# Altium PCB ADC_Klipper_Board.PcbDoc (part 1 of 2)
Units mm, origin at the board's own origin, x right, y up, seen from the top; angles counter-clockwise.
Board outline 69 x 45 mm, 4 copper layers (F.Cu, In1.Cu, In2.Cu, B.Cu); 84 components, 97 nets, 307 pads, 172 vias.
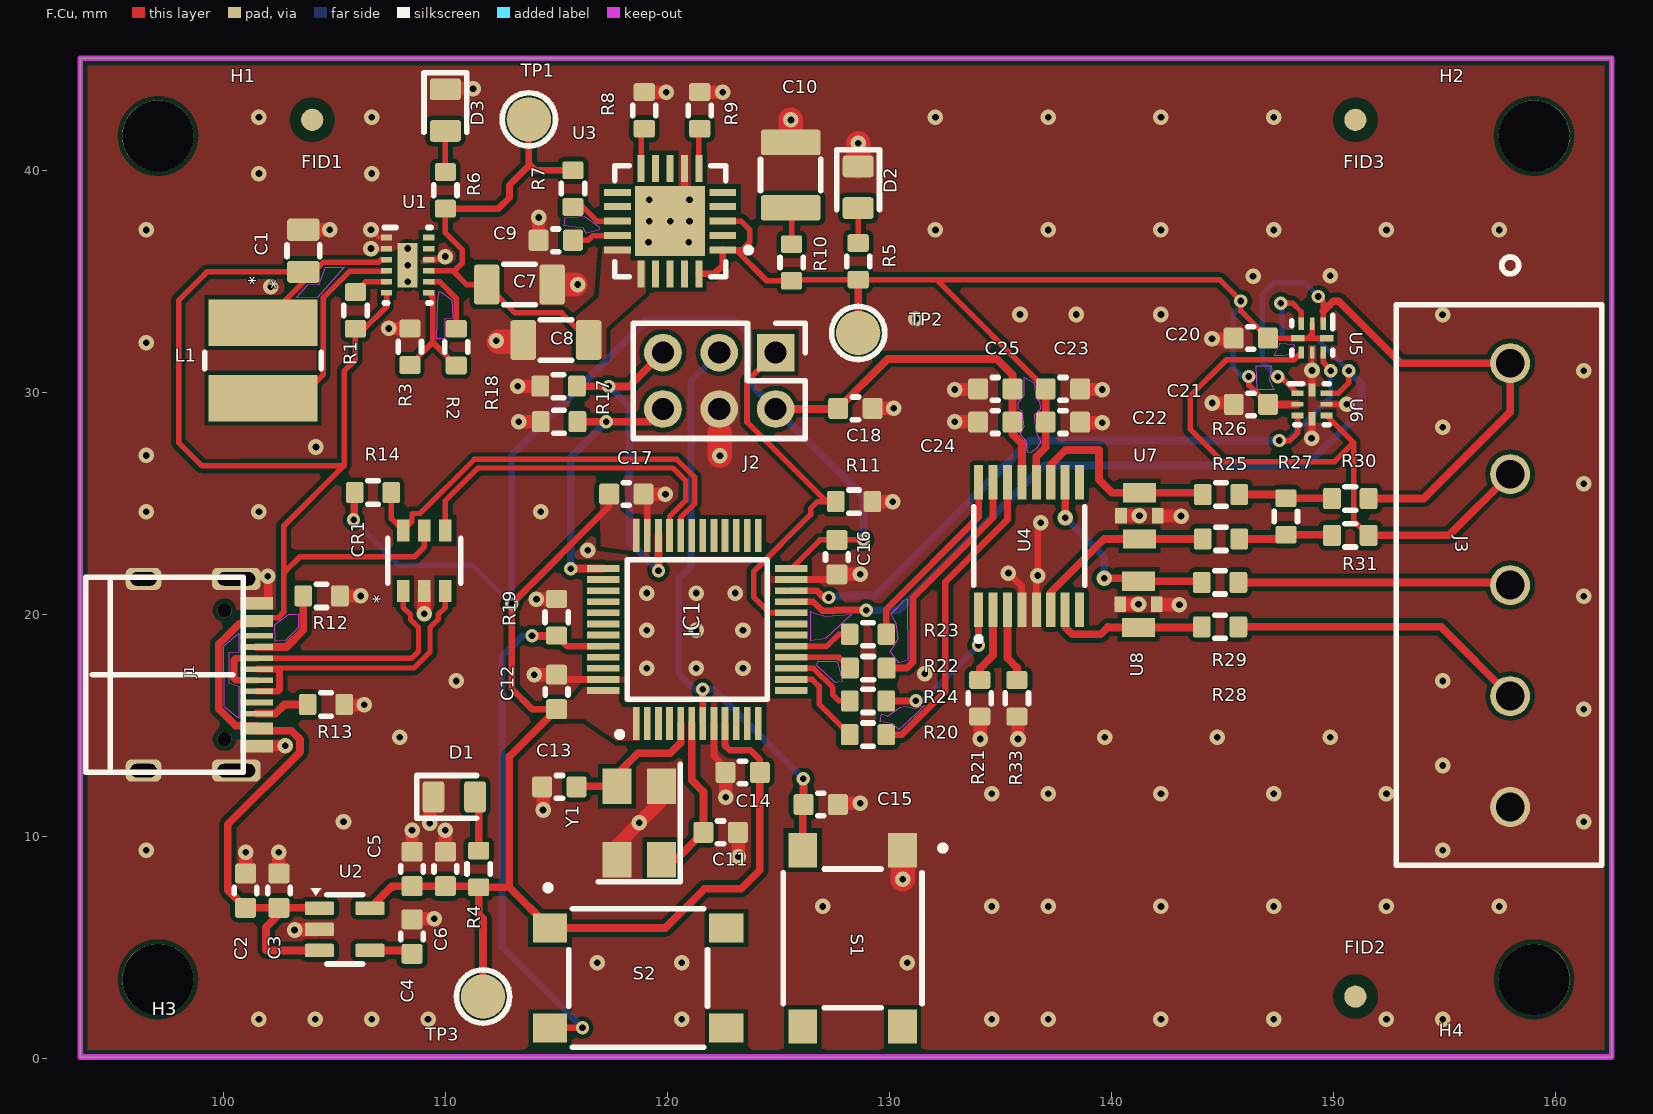
[diagram p0: F.Cu view]
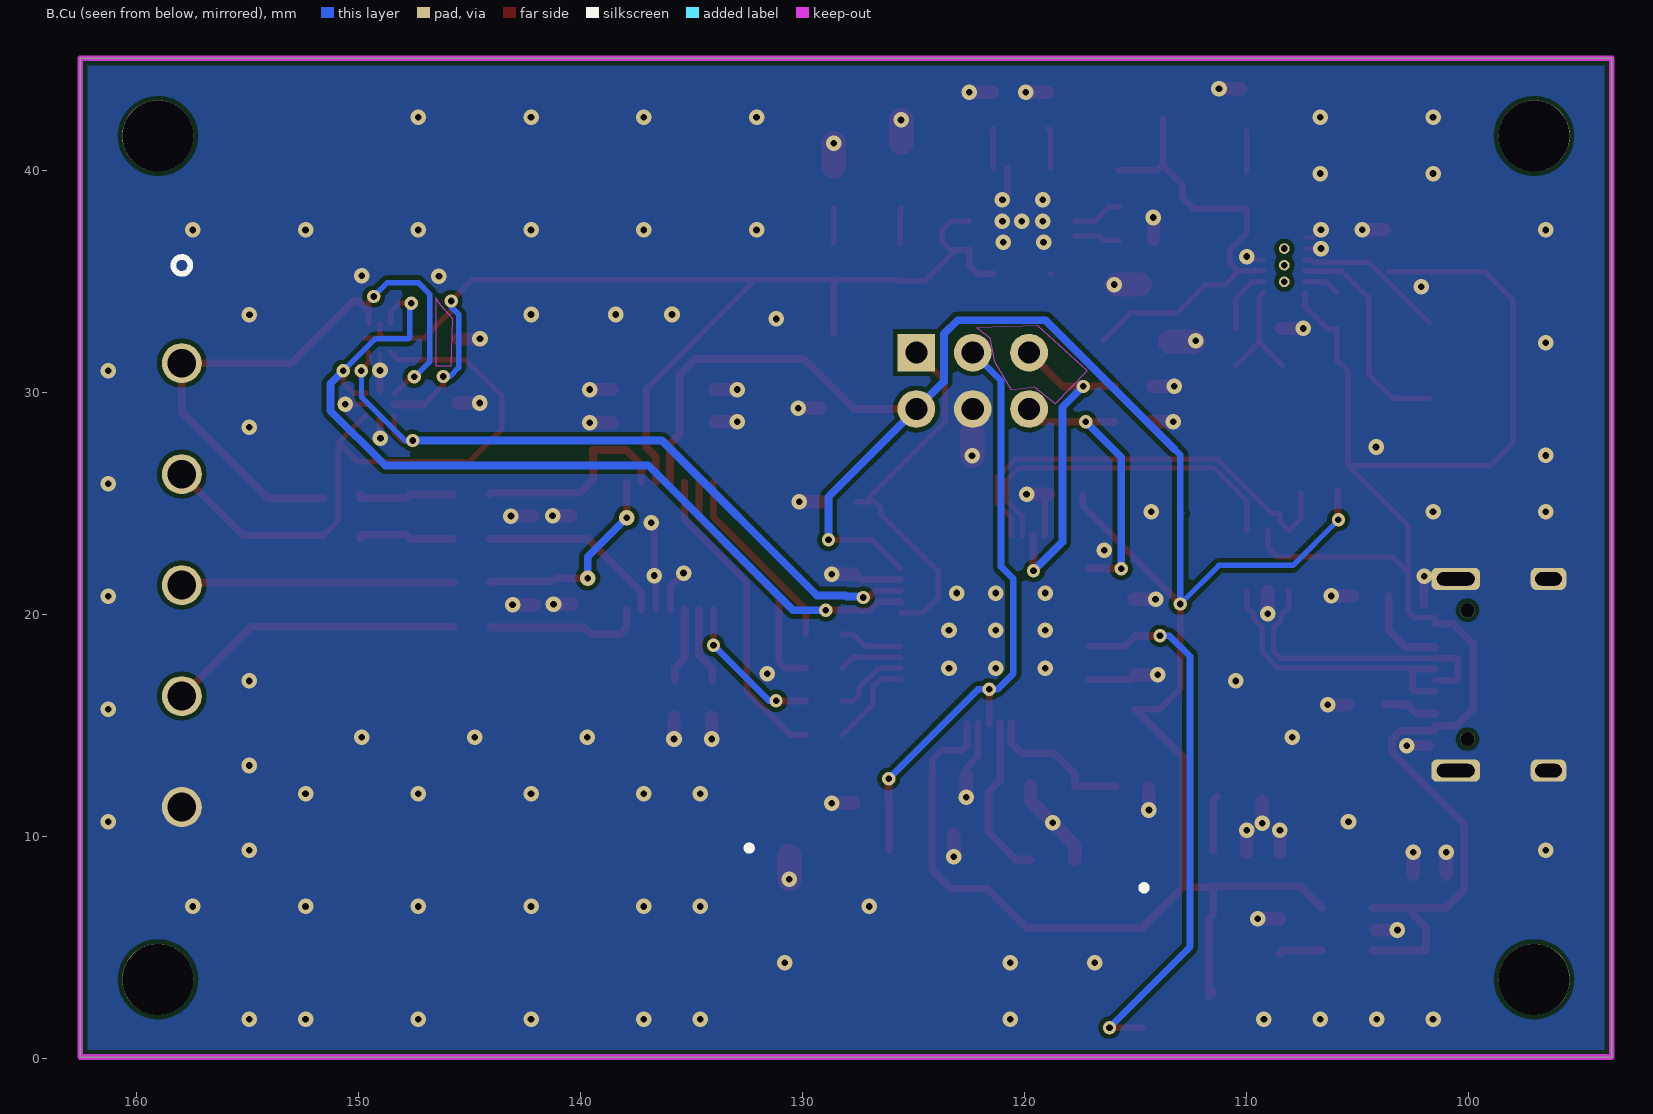
[diagram p1: B.Cu view, seen from below]
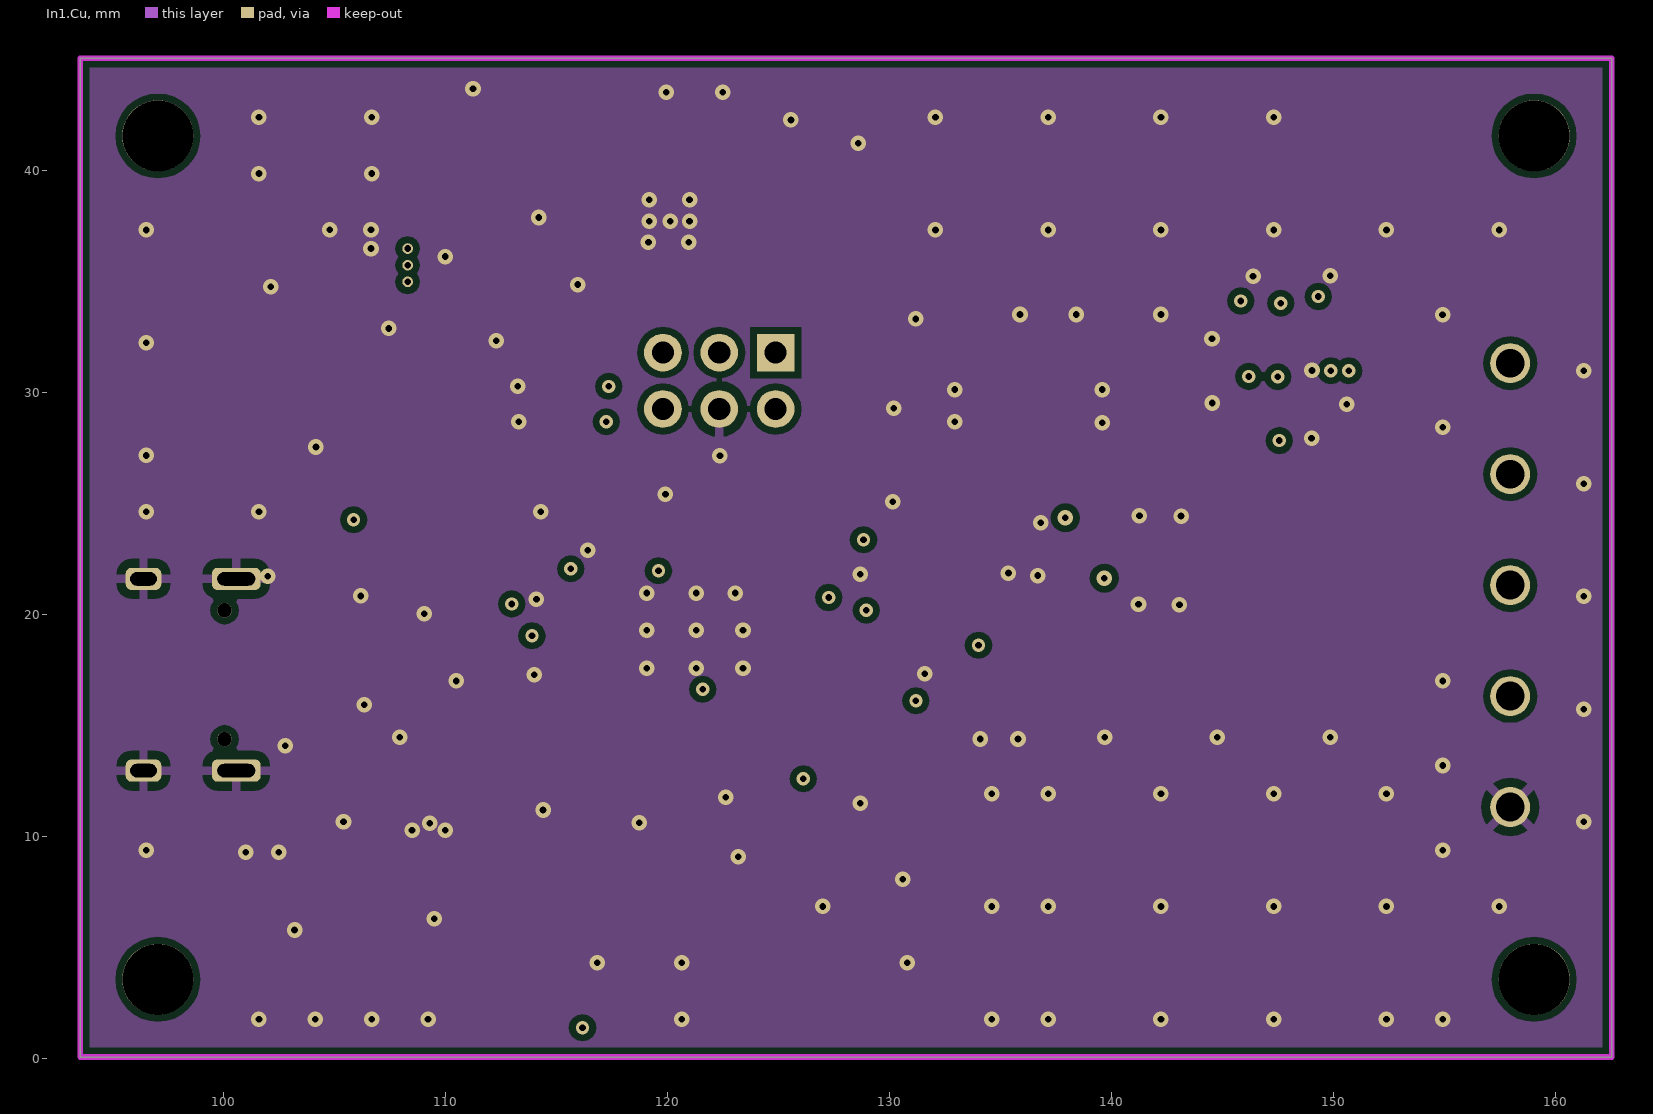
[diagram p2: In1.Cu]
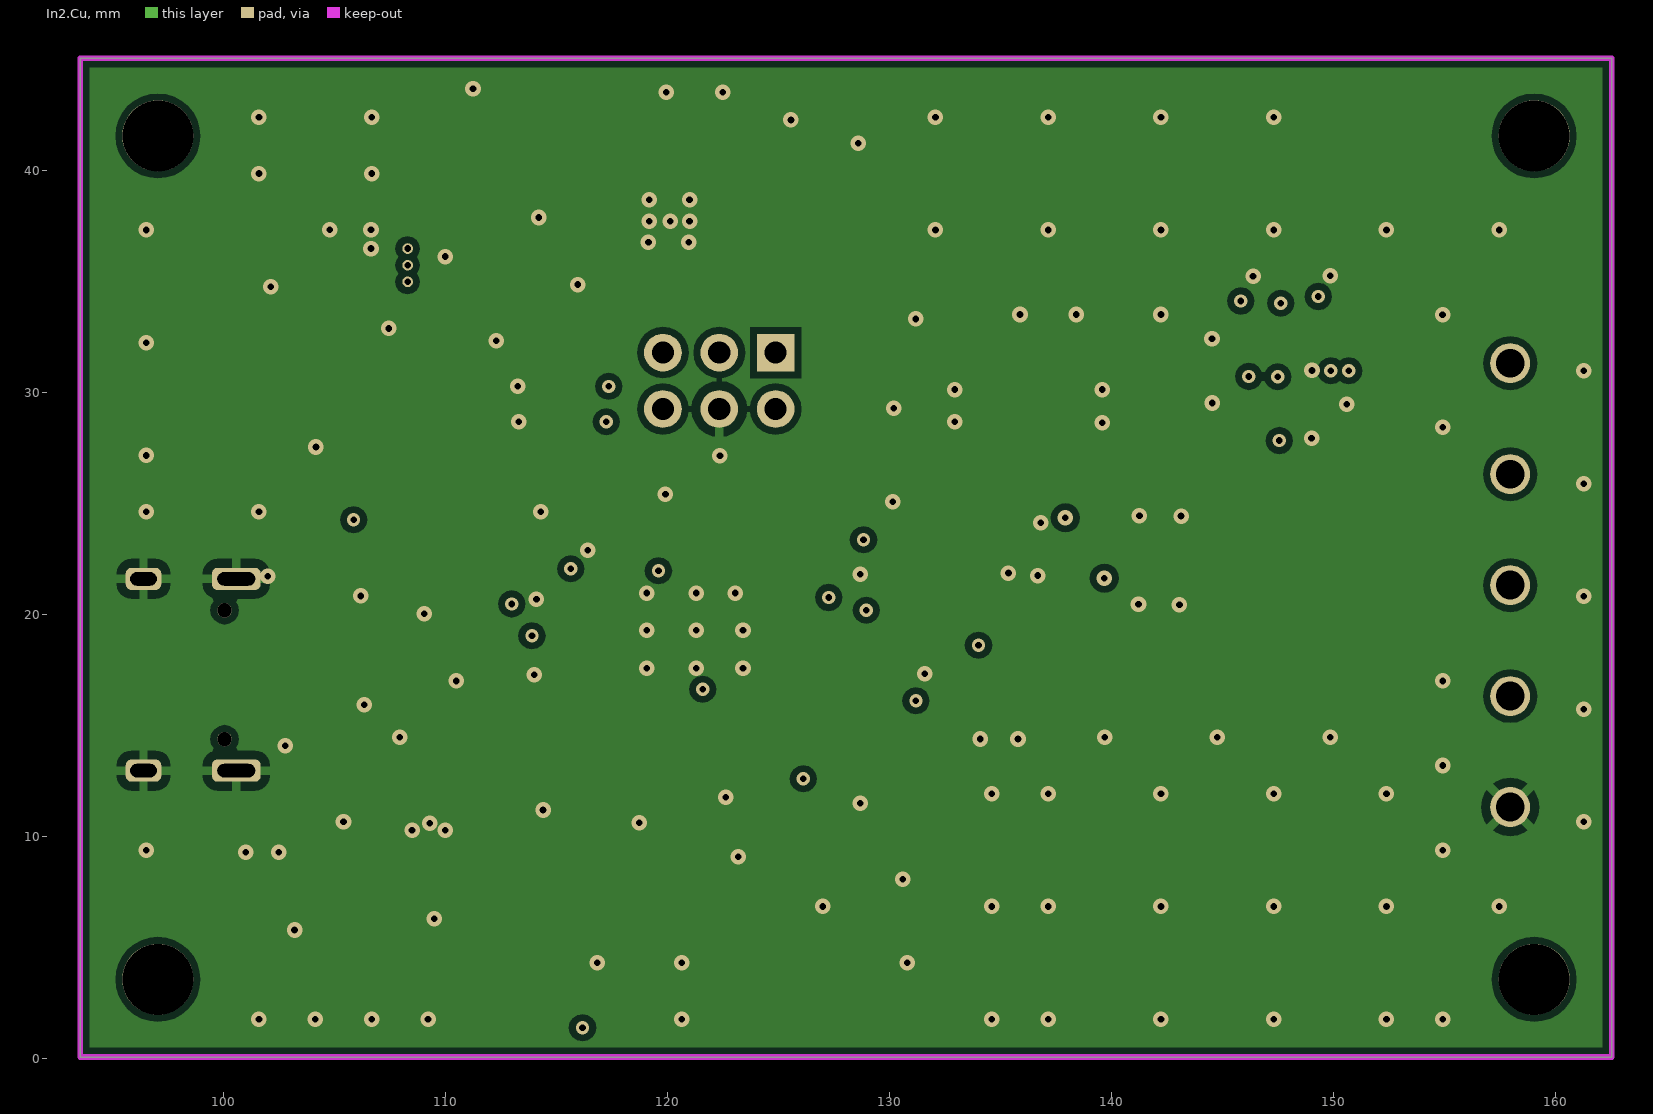
[diagram p3: In2.Cu]

## Layer stack, top to bottom
F.Mask: solder mask 0.0102, Solder Resist, Dk 3.5
F.Cu: signal copper 0.0356
Dielectric 1: dielectric 0.32, FR-4, Dk 4.8
In1.Cu: signal copper 0.0356
Dielectric2: dielectric 0.32, FR-4, Dk 4.8
In2.Cu: signal copper 0.0356
Dielectric3: dielectric 0.32, FR-4, Dk 4.8
B.Cu: signal copper 0.0356
B.Mask: solder mask 0.0102, Solder Resist, Dk 3.5

## Board outline
93.55,45.075 93.55,0.075 162.55,0.075 162.55,45.075 93.55,45.075

## Design rules (kind name [scope] priority, off if disabled: settings)
Clearance "Clearence 0,5_PadClass" [InPadClass('Pad Class Clearance 0,5')] p1: gap=0.5 ignorepadtopadclearanceinfootprint=FALSE
Clearance "Clearence 0,3_Polygon" [InNamedPolygon('In1.Cu-GND') OR InNamedPolygon('In2.Cu-GND')] p2: gap=0.3 ignorepadtopadclearanceinfootprint=FALSE
Clearance "Clearence 0,2_Polygon" [InNamedPolygon('F.Cu-+3V3') OR InNamedPolygon('F.Cu-GND-6') OR InNamedPolygon('F.Cu-+5V5') OR InNamedPolygon('F.Cu-+3V3-1') OR InNamedPolygon('F.Cu-GND-9') OR InNamedPolygon('B.Cu-GND')] p3: gap=0.2 ignorepadtopadclearanceinfootprint=FALSE
Clearance "Clearence 0,01_PadClass" [InPadClass('Pad Class Clearance 0,01')] p4: gap=0.01 ignorepadtopadclearanceinfootprint=FALSE
MinimumSolderMaskSliver [All] p1: minsoldermaskwidth=0
PolygonConnect Polygon_B.Cu-+3V3_ConnectDirect [IsNamedPolygon('B.Cu-+3V3')] p1: connectstyle=Direct reliefconductorwidth=0.254 reliefentries=4 polygonreliefangle="90 Angle" airgapwidth=0.254
PolygonConnect Polygon_In2.Cu-GND_ConnectDirect [IsNamedPolygon('In2.Cu-GND') vs IsVia] p2: connectstyle=Direct reliefconductorwidth=0.254 reliefentries=4 polygonreliefangle="90 Angle" airgapwidth=0.254
PolygonConnect Polygon_In2.Cu-GND_ConnectRelief45 [IsNamedPolygon('In2.Cu-GND') vs (IsThruPin or IsSMTPin) and (PadShape_AllLayers = 'Round')] p3: connectstyle=Relief reliefconductorwidth=0.4 reliefentries=4 polygonreliefangle="45 Angle" airgapwidth=0.4
PolygonConnect Polygon_In2.Cu-GND_ConnectRelief90 [IsNamedPolygon('In2.Cu-GND') vs (IsThruPin or IsSMTPin) and (PadShape_AllLayers <> 'Round')] p4: connectstyle=Relief reliefconductorwidth=0.4 reliefentries=4 polygonreliefangle="90 Angle" airgapwidth=0.4
PolygonConnect Polygon_In1.Cu-GND_ConnectDirect [IsNamedPolygon('In1.Cu-GND') vs IsVia] p5: connectstyle=Direct reliefconductorwidth=0.254 reliefentries=4 polygonreliefangle="90 Angle" airgapwidth=0.254
PolygonConnect Polygon_In1.Cu-GND_ConnectRelief45 [IsNamedPolygon('In1.Cu-GND') vs (IsThruPin or IsSMTPin) and (PadShape_AllLayers = 'Round')] p6: connectstyle=Relief reliefconductorwidth=0.4 reliefentries=4 polygonreliefangle="45 Angle" airgapwidth=0.4
PolygonConnect Polygon_In1.Cu-GND_ConnectRelief90 [IsNamedPolygon('In1.Cu-GND') vs (IsThruPin or IsSMTPin) and (PadShape_AllLayers <> 'Round')] p7: connectstyle=Relief reliefconductorwidth=0.4 reliefentries=4 polygonreliefangle="90 Angle" airgapwidth=0.4
PolygonConnect Polygon_B.Cu-GND_ConnectDirect [IsNamedPolygon('B.Cu-GND')] p8: connectstyle=Direct reliefconductorwidth=0.254 reliefentries=4 polygonreliefangle="90 Angle" airgapwidth=0.254
PolygonConnect Polygon_F.Cu-GND-9_ConnectDirect [IsNamedPolygon('F.Cu-GND-9')] p9: connectstyle=Direct reliefconductorwidth=0.254 reliefentries=4 polygonreliefangle="90 Angle" airgapwidth=0.254
PolygonConnect Polygon_F.Cu-GND-8_ConnectDirect [IsNamedPolygon('F.Cu-GND-8')] p10: connectstyle=Direct reliefconductorwidth=0.254 reliefentries=4 polygonreliefangle="90 Angle" airgapwidth=0.254
PolygonConnect Polygon_F.Cu-+3V3-1_ConnectDirect [IsNamedPolygon('F.Cu-+3V3-1')] p11: connectstyle=Direct reliefconductorwidth=0.254 reliefentries=4 polygonreliefangle="90 Angle" airgapwidth=0.254
PolygonConnect Polygon_F.Cu-GND-7_ConnectDirect [IsNamedPolygon('F.Cu-GND-7')] p12: connectstyle=Direct reliefconductorwidth=0.254 reliefentries=4 polygonreliefangle="90 Angle" airgapwidth=0.254
PolygonConnect Polygon_F.Cu-+5V5_ConnectDirect [IsNamedPolygon('F.Cu-+5V5')] p13: connectstyle=Direct reliefconductorwidth=0.254 reliefentries=4 polygonreliefangle="90 Angle" airgapwidth=0.254
PolygonConnect Polygon_F.Cu-GND-6_ConnectDirect [IsNamedPolygon('F.Cu-GND-6')] p14: connectstyle=Direct reliefconductorwidth=0.254 reliefentries=4 polygonreliefangle="90 Angle" airgapwidth=0.254
PolygonConnect Polygon_F.Cu-GND-5_ConnectDirect [IsNamedPolygon('F.Cu-GND-5')] p15: connectstyle=Direct reliefconductorwidth=0.254 reliefentries=4 polygonreliefangle="90 Angle" airgapwidth=0.254
PolygonConnect Polygon_F.Cu-GND-4_ConnectDirect [IsNamedPolygon('F.Cu-GND-4')] p16: connectstyle=Direct reliefconductorwidth=0.254 reliefentries=4 polygonreliefangle="90 Angle" airgapwidth=0.254
PolygonConnect Polygon_F.Cu-GND-3_ConnectDirect [IsNamedPolygon('F.Cu-GND-3')] p17: connectstyle=Direct reliefconductorwidth=0.254 reliefentries=4 polygonreliefangle="90 Angle" airgapwidth=0.254
PolygonConnect Polygon_F.Cu-GND-2_ConnectDirect [IsNamedPolygon('F.Cu-GND-2')] p18: connectstyle=Direct reliefconductorwidth=0.254 reliefentries=4 polygonreliefangle="90 Angle" airgapwidth=0.254
PolygonConnect Polygon_F.Cu-GND-1_ConnectDirect [IsNamedPolygon('F.Cu-GND-1')] p19: connectstyle=Direct reliefconductorwidth=0.254 reliefentries=4 polygonreliefangle="90 Angle" airgapwidth=0.254
PolygonConnect Polygon_F.Cu-+3V3_ConnectDirect [IsNamedPolygon('F.Cu-+3V3')] p20: connectstyle=Direct reliefconductorwidth=0.254 reliefentries=4 polygonreliefangle="90 Angle" airgapwidth=0.254
PolygonConnect Polygon_F.Cu-GND_ConnectDirect [IsNamedPolygon('F.Cu-GND')] p21: connectstyle=Direct reliefconductorwidth=0.254 reliefentries=4 polygonreliefangle="90 Angle" airgapwidth=0.254
RoutingVias [All] p1: holewidth=0.711 width=1.27 viastyle="Through Hole" minholewidth=0.711 minwidth=1.27 maxholewidth=0.711 maxwidth=1.27
SilkToSilkClearance [All] p1: silktosilkclearance=0
SilkToSolderMaskClearance [IsPad] p1: minsilkscreentomaskgap=0 clearancetoexposedcopper=TRUE
SolderMaskExpansion [All] p1: expansion=0.102 istentingtop=FALSE
Width [All] p1: maxlimit=10 minlimit=0.254 preferedwidth=0.254 midlayer1_maxwidth=0.254 midlayer2_maxwidth=0.254 minimp=50.000000 maximp=50.000000 favimp=50.000000
27 further rules are at their usual default settings.

## Classes and differential pairs
pad class "Pad Class Clearance 0,01": J1-Un1 J1-Un2
pad class "Pad Class Clearance 0,5": FID1-Un1 FID2-Un1 FID3-Un1

## Components (designator, comment, footprint, x,y, rotation, side; value= is the part's Value field where it differs from the comment)
C1 "Comment" C_0805_2012Metric 103.6,36.4 r90 top value=4.7uF
C2 "Comment" C_0603_1608Metric 101,7.575 r90 top value=1uF
C3 "Comment" C_0603_1608Metric 102.5,7.575 r90 top value="100 nF"
C4 "Comment" C_0603_1608Metric 108.5,5.5 r90 top value="10 nF"
C5 "Comment" C_0603_1608Metric 108.5,8.55 r90 top value=1uF
C6 "Comment" C_0603_1608Metric 110,8.55 r90 top value="100 nF"
C7 "Comment" C_1206_3216Metric 113.335,34.88 r0 top value=10uF
C8 "Comment" C_1206_3216Metric 114.98,32.38 r180 top value=10uF
C9 "Comment" C_0603_1608Metric 114.975,36.875 r180 top value=1uF
C10 "Comment" C_1210_3225Metric 125.56,39.81 r90 top value=22uF
C11 "Comment" C_0603_1608Metric 122.4,10.2 r180 top value="30 pF"
C12 "Comment" C_0603_1608Metric 115.013,16.525 r90 top value="100 nF"
C13 "Comment" C_0603_1608Metric 115.138,12.25 r0 top value="30 pF"
C14 "Comment" C_0603_1608Metric 123.39,12.9 r180 top value="100 nF"
C15 "Comment" C_0603_1608Metric 126.912,11.45 r180 top value="100 nF"
C16 "Comment" C_0603_1608Metric 127.638,22.6 r270 top value="100 nF"
C17 "Comment" C_0603_1608Metric 118.15,25.44 r0 top value="100 nF"
C18 "Comment" C_0603_1608Metric 128.475,29.3 r180 top value="100 nF"
C20 "Comment" C_0603_1608Metric 146.285,32.467 r180 top value=1uF
C21 "Comment" C_0603_1608Metric 146.295,29.48 r180 top value=1uF
C22 "Comment" C_0603_1608Metric 137.825,28.68 r0 top value=1uF
C23 "Comment" C_0603_1608Metric 137.825,30.18 r0 top value="100 nF"
C24 "Comment" C_0603_1608Metric 134.775,28.68 r180 top value=1uF
C25 "Comment" C_0603_1608Metric 134.775,30.18 r180 top value="100 nF"
CR1 "Comment" SOT23-6L_STM 109.05,22.435 r90 top value=USBLC6-2SC6
D1 "Comment" LED_0805_2012Metric 110.4,11.8 r0 top value=LED
D2 "Comment" LED_0805_2012Metric 128.6,39.262 r270 top value=LED
D3 "Comment" LED_0805_2012Metric 110,42.737 r270 top value=LED
FID1 "Comment" Fiducial_1mm_Mask2mm 104,42.3 r0 top value=Fiducial
FID2 "Comment" Fiducial_1mm_Mask2mm 151,2.8 r0 top value=Fiducial
FID3 "Comment" Fiducial_1mm_Mask2mm 151,42.3 r0 top value=Fiducial
H1 "Comment" MountingHole_3.2mm_M3_ISO7380 97.05,41.575 r0 top value=MountingHole
H2 "Comment" MountingHole_3.2mm_M3_ISO7380 159.05,41.575 r0 top value=MountingHole
H3 "Comment" MountingHole_3.2mm_M3_ISO7380 97.05,3.575 r0 top value=MountingHole
H4 "Comment" MountingHole_3.2mm_M3_ISO7380 159.05,3.575 r0 top value=MountingHole
IC1 "Comment" QFP50P900X900X160-48N 121.35,19.338 r90 top value=STM32F103C6T7A
J1 "Comment" TYPE-C-31-M-12 96.4,17.3 r270 top value=Connector_USB_C_Receptacle_USB2.0
J2 "Comment" PinHeader_2x03_P2.54mm_Vertical 124.88,31.812 r270 top value=DBG
J3 "Comment" CONN_1935190_PXC 157.975,31.337 r270 top value=1935190
L1 "Comment" IND_5028_TDK 101.78,31.46 r270 top value=2.7uH
R1 "Comment" R_0603_1608Metric 105.95,33.715 r90 top value=2.0k
R2 "Comment" R_0603_1608Metric 110.49,32.06 r270 top value=45.3k
R3 "Comment" R_0603_1608Metric 108.4,32.075 r270 top value=10k
R4 "Comment" R_0603_1608Metric 111.5,8.55 r90 top value=6.65k
R5 "Comment" R_0603_1608Metric 128.6,35.925 r90 top value=6.65k
R6 "Comment" R_0603_1608Metric 110,39.125 r90 top value=10k
R7 "Comment" R_0603_1608Metric 115.75,39.2 r270 top value=100k
R8 "Comment" R_0603_1608Metric 118.96,42.725 r90 top value=0
R9 "Comment" R_0603_1608Metric 121.46,42.725 r90 top value=0
R10 "Comment" R_0603_1608Metric 125.6,35.875 r90 top value=0.1
R11 "Comment" R_0603_1608Metric 128.413,25.1 r0 top value=10k
R12 "Comment" R_0603_1608Metric 104.425,20.85 r180 top value=5k1
R13 "Comment" R_0603_1608Metric 104.62,15.96 r180 top value=5k1
R14 "Comment" R_0603_1608Metric 106.74,25.51 r180 top value=1k5
R17 "Comment" R_0603_1608Metric 115.125,28.7 r0 top value=10k
R18 "Comment" R_0603_1608Metric 115.1,30.3 r180 top value=10k
R19 "Comment" R_0603_1608Metric 115.012,19.888 r90 top value=10k
R20 "Comment" R_0603_1608Metric 129.04,14.6 r0 top value=47
R21 "Comment" R_0603_1608Metric 134.075,16.237 r90 top value=10k
R22 "Comment" R_0603_1608Metric 129.052,17.6 r0 top value=47
R23 "Comment" R_0603_1608Metric 129.04,19.125 r0 top value=47
R24 "Comment" R_0603_1608Metric 129.04,16.12 r0 top value=47
R25 "Comment" R_0603_1608Metric 144.945,25.42 r180 top value=0
R26 "Comment" R_0603_1608Metric 144.945,23.42 r180 top value=0
R27 "Comment" R_0603_1608Metric 147.87,24.43 r270 top value=9.09k
R28 "Comment" R_0603_1608Metric 144.903,21.458 r0 top value=47
R29 "Comment" R_0603_1608Metric 144.903,19.458 r0 top value=47
R30 "Comment" R_0603_1608Metric 150.77,25.24 r180 top value=0
R31 "Comment" R_0603_1608Metric 150.77,23.58 r180 top value=0
R33 "Comment" R_0603_1608Metric 135.75,16.237 r90 top value=10k
S1 "Comment" SWITCH_43SMTR92LFS 128.35,5.425 r270 top value=Reset
S2 "Comment" SWITCH_43SMTR92LFS 118.687,3.638 r0 top value=Boot
TP1 "Comment" TestPoint_Pad_D2.0mm 113.76,42.32 r0 top value=TestPoint
TP2 "Comment" TestPoint_Pad_D2.0mm 128.6,32.7 r0 top value=TestPoint
TP3 "Comment" TestPoint_Pad_D2.0mm 111.7,2.8 r0 top value=TestPoint
U1 "Comment" DSS0012A 108.3,35.75 r0 top value=TPS61096ADSSR
U2 "Comment" SOT-23-5 105.465,5.83 r0 top value=LD3985M33R_SOT23
U3 "Comment" RGW0020A-IPC_A 120.125,37.735 r180 top value=TPS7A4700RGWR
U4 "Comment" SOP65P640X120-16N 136.3,23.1 r90 top value=ADS1220xPW
U5 "Comment" RSE0008A 149.06,32.467 r270 top value=TS5A21366RSER
U6 "Comment" RSE0008A 149.045,29.48 r0 top value=TS5A21366RSER
U7 "Comment" X15 141.27,24.461 r90 top value="100 nF"
U8 "Comment" X15 141.228,20.471 r90 top value="100 nF"
Y1 "Comment" Crystal_SMD_5032-4Pin_5.0x3.2mm 118.738,10.625 r90 top value="8 Mhz"

## Footprints (in the part's own frame and the unit in brackets; to place one, negate y for a bottom-side part, rotate by r counter-clockwise, add the part's x,y. Pads: shape width x height; smd on the part's side, far side on the other; paste and mask are expansions set on the pad)
C_0603_1608Metric [mm]
  rrect25% 0.9x0.95 smd mask+0: 1(-0.775,0) 2(0.775,0)
  silkscreen extent -0.14,-0.51 0.14,0.51
C_0805_2012Metric [mm]
  rrect25% 1x1.45 smd mask+0: 1(-0.95,0) 2(0.95,0)
  silkscreen extent -0.26,-0.73 0.26,0.73
C_1206_3216Metric [mm]
  rrect22% 1.15x1.8 smd mask+0: 1(-1.475,0) 2(1.475,0)
  silkscreen extent -0.71,-0.91 0.71,0.91
C_1210_3225Metric [mm]
  rrect22% 1.15x2.7 smd mask+0: 1(-1.475,0) 2(1.475,0)
  silkscreen extent -0.71,-1.36 0.71,1.36
CONN_1935190_PXC [mil]
  round 71 hole 51 paste-99999 mask+0: 1(0,0) 2(196.85,0) 3(393.7,0) 4(590.55,0) 5(787.4,0)
  silkscreen extent -188,-202 891,162
Crystal_SMD_5032-4Pin_5.0x3.2mm [mm]
  rect 1.6x1.3 smd mask+0: 1(-1.65,-1) 2(1.65,-1) 3(1.65,1) 4(-1.65,1)
  silkscreen extent -2.65,-1.85 2.65,1.85
DSS0012A [mm]
  rect 0.5x0.25 smd mask+0: 1(-0.95,1.25) 2(-0.95,0.75) 3(-0.95,0.25) 4(-0.95,-0.25) 5(-0.95,-0.75) 6(-0.95,-1.25) 7(0.95,-1.25) 8(0.95,-0.75) 9(0.95,-0.25) 10(0.95,0.25) 11(0.95,0.75) 12(0.95,1.25)
  rect 0.9x2 smd mask+0: 13(0,0)
  round 0.483 hole 0.3 paste-2539.97 mask+0: V(0,-0.75) V(0,0) V(0,0.75)
  silkscreen extent -1.05,-1.7 1.05,1.7
Fiducial_1mm_Mask2mm [mm]
  round 1 smd paste-1 mask+0.5: Un1(0,0)
IND_5028_TDK [mm]
  rect 2.1x4.9 smd mask+0: 1(-1.7,0) 2(1.7,0)
  silkscreen extent -0.37,-2.63 0.37,2.63
LED_0805_2012Metric [mm]
  rrect25% 0.975x1.4 smd mask+0: 1(-0.937,0) 2(0.937,0)
  silkscreen extent -1.69,-0.96 1,0.96
MountingHole_3.2mm_M3_ISO7380 [mm]
  round 3.2 hole 3.2 paste-2539.97 mask+0: Un1(0,0)
PinHeader_2x03_P2.54mm_Vertical [mm]
  rect 1.7x1.7 hole 1 paste-2539.97 mask+0: 1(0,0)
  rrect100% 1.7x1.7 hole 1 paste-2539.97 mask+0: 2(2.54,0) 3(0,-2.54) 4(2.54,-2.54) 5(0,-5.08) 6(2.54,-5.08)
  silkscreen extent -1.33,-6.41 3.87,1.33
QFP50P900X900X160-48N [mm]
  rect 1.475x0.3 smd mask+0: 1(-4.238,2.75) 2(-4.238,2.25) 3(-4.238,1.75) 4(-4.238,1.25) 5(-4.238,0.75) 6(-4.238,0.25) 7(-4.238,-0.25) 8(-4.238,-0.75) 9(-4.238,-1.25) 10(-4.238,-1.75) 11(-4.238,-2.25) 12(-4.238,-2.75) 25(4.238,-2.75) 26(4.238,-2.25) 27(4.238,-1.75) 28(4.238,-1.25) 29(4.238,-0.75) 30(4.238,-0.25) 31(4.238,0.25) 32(4.238,0.75) 33(4.238,1.25) 34(4.238,1.75) 35(4.238,2.25) 36(4.238,2.75)
  rect 0.3x1.475 smd mask+0: 13(-2.75,-4.238) 14(-2.25,-4.238) 15(-1.75,-4.238) 16(-1.25,-4.238) 17(-0.75,-4.238) 18(-0.25,-4.238) 19(0.25,-4.238) 20(0.75,-4.238) 21(1.25,-4.238) 22(1.75,-4.238) 23(2.25,-4.238) 24(2.75,-4.238) 37(2.75,4.238) 38(2.25,4.238) 39(1.75,4.238) 40(1.25,4.238) 41(0.75,4.238) 42(0.25,4.238) 43(-0.25,4.238) 44(-0.75,4.238) 45(-1.25,4.238) 46(-1.75,4.238) 47(-2.25,4.238) 48(-2.75,4.238)
  silkscreen extent -4.85,-3.15 3.15,3.62
R_0603_1608Metric [mm]
  rrect25% 0.8x0.95 smd mask+0: 1(-0.825,0) 2(0.825,0)
  silkscreen extent -0.24,-0.52 0.24,0.52
RGW0020A-IPC_A [mm]
  rect 1.207x0.316 smd mask+0: 1(-2.376,1.3) 2(-2.376,0.65) 3(-2.376,0) 4(-2.376,-0.65) 5(-2.376,-1.3) 11(2.376,-1.3) 12(2.376,-0.65) 13(2.376,0) 14(2.376,0.65) 15(2.376,1.3)
  rect 0.316x1.207 smd mask+0: 6(-1.3,-2.376) 7(-0.65,-2.376) 8(0,-2.376) 9(0.65,-2.376) 10(1.3,-2.376) 16(1.3,2.376) 17(0.65,2.376) 18(0,2.376) 19(-0.65,2.376) 20(-1.3,2.376)
  rect 3.15x3.15 smd paste-3.15 mask+0: 21(0,0)
  silkscreen extent -3.65,-2.5 2.5,2.5
RSE0008A [mm]
  rect 0.55x0.25 smd mask+0: 1(-0.65,0.5) 3(-0.65,-0.5) 5(0.65,-0.5) 7(0.65,0.5)
  rect 0.55x0.2 smd mask+0: 2(-0.65,0) 6(0.65,0)
  rect 0.3x0.6 smd mask+0: 4(0,-0.65) 8(0,0.65)
  silkscreen extent -1.02,-0.92 0.77,0.92
SOP65P640X120-16N [mm]
  rrect12% 1.57x0.41 smd mask+0.102: 1(-2.87,2.275) 2(-2.87,1.625) 3(-2.87,0.975) 4(-2.87,0.325) 5(-2.87,-0.325) 6(-2.87,-0.975) 7(-2.87,-1.625) 8(-2.87,-2.275) 9(2.87,-2.275) 10(2.87,-1.625) 11(2.87,-0.975) 12(2.87,-0.325) 13(2.87,0.325) 14(2.87,0.975) 15(2.87,1.625) 16(2.87,2.275)
  silkscreen extent -4.29,-2.5 1.77,2.5
SOT23-6L_STM [mil]
  rect 38.5x22 smd mask+0: 1(-53.75,37.4) 2(-53.75,0) 3(-53.75,-37.4) 4(53.75,-37.4) 5(53.75,0) 6(53.75,37.4)
  silkscreen extent -40,-65 40,65
SOT-23-5 [mm]
  rrect25% 1.325x0.6 smd mask+0: 1(-1.138,0.95) 2(-1.138,0) 3(-1.138,-0.95) 4(1.138,-0.95) 5(1.138,0.95)
  silkscreen extent -1.54,-1.56 0.8,1.84
SWITCH_43SMTR92LFS [mm]
  rect 1.549x1.295 smd mask+0: 1(-3.975,2.25) 2(3.975,2.25) 3(-3.975,-2.25) 4(3.975,-2.25)
  silkscreen extent -4.19,-3.12 3.12,4.19
TestPoint_Pad_D2.0mm [mm]
  round 2 smd paste-2 mask+0: 1(0,0)
  silkscreen extent -1.2,-1.2 1.2,1.2
TYPE-C-31-M-12 [mm]
  rect 0.25x1.45 smd mask+0: A1(-3.375,5.1) A4(-2.575,5.1) A5(-1.25,5.1) A6(-0.25,5.1) A7(0.25,5.1) A8(1.25,5.1) A9(2.575,5.1) A12(3.375,5.1) B5(1.75,5.1) B6(0.75,5.1) B7(-0.75,5.1) B8(-1.75,5.1)
  rect 0.3x1.45 smd mask+0: B1(3.1,5.1) B4(2.3,5.1) B9(-2.3,5.1) B12(-3.1,5.1)
  rrect50% 1x2.2 hole 1.7 slot 0.6 at 0 deg paste-2539.97 mask+0: S1(-4.32,4.18) S1(4.32,4.18)
  rrect50% 1x1.6 hole 1.2 slot 0.6 at 0 deg paste-2539.97 mask+0: S1(-4.32,0) S1(4.32,0)
  round 0.65 hole 0.65 paste-2539.97 mask+0.01: Un1(-2.9,3.65) Un2(2.9,3.65)
  silkscreen extent -4.4,-2.6 4.4,4.5
X15 [mil]
  rect 34x58 smd mask+0: 1(-41,0) 2(41,0)
  rect 27x21 smd mask+0: 3(0,32.5) 4(0,-32.5)

## Part data
C1: library part C_0805_2012Metric, "Capacitor SMD 0805 (2012 Metric), square (rectangular) end terminal, IPC_7351 nominal, (Body size source: IPC-SM-782 page 76, https://www.pcb-3d.com/wordpress/wp-content/uploads/ipc-sm-782a_amendment_1_and_2.pdf, https://docs.google.com/spreadsheets/d/1BsfQQcO9C6DZCsRaXUlFlo91Tg2WpOkGARC1WS5S8t0/edit?usp=sharing), generated with kicad-footprint-generator", MANUFACTURER=Murata, LCSC=C415536, Manufacturer_Part_Number=GRM21BR71A475KE51L, Footprint=Capacitor_SMD:C_0805_2012Metric, Datasheet=GRM21BR71A475KE51L, Description="Unpolarized capacitor", ki_fp_filters=C_*
C2 C5 C9 C20 C21 C22 C24: library part C_0603_1608Metric, "Capacitor SMD 0603 (1608 Metric), square (rectangular) end terminal, IPC_7351 nominal, (Body size source: IPC-SM-782 page 76, https://www.pcb-3d.com/wordpress/wp-content/uploads/ipc-sm-782a_amendment_1_and_2.pdf), generated with kicad-footprint-generator", MANUFACTURER=Murata, LCSC=C908553, Manufacturer_Part_Number=GCJ188R71E105KA01D, Footprint=Capacitor_SMD:C_0603_1608Metric, Datasheet=GCJ188R71E105KA01D, Description="Unpolarized capacitor", ki_fp_filters=C_*
C3 C6 C12 C14 C15 C16 C17 C18 C23 C25: library part C_0603_1608Metric, "Capacitor SMD 0603 (1608 Metric), square (rectangular) end terminal, IPC_7351 nominal, (Body size source: IPC-SM-782 page 76, https://www.pcb-3d.com/wordpress/wp-content/uploads/ipc-sm-782a_amendment_1_and_2.pdf), generated with kicad-footprint-generator", MANUFACTURER=Yageo, LCSC=C108079, Manufacturer_Part_Number=CC0603KRX7R7BB104, Footprint=Capacitor_SMD:C_0603_1608Metric, Datasheet=CC0603KRX7R7BB104, Description="Unpolarized capacitor", ki_fp_filters=C_*
C4: library part C_0603_1608Metric, "Capacitor SMD 0603 (1608 Metric), square (rectangular) end terminal, IPC_7351 nominal, (Body size source: IPC-SM-782 page 76, https://www.pcb-3d.com/wordpress/wp-content/uploads/ipc-sm-782a_amendment_1_and_2.pdf), generated with kicad-footprint-generator", MANUFACTURER=Yageo, LCSC=C100042, Manufacturer_Part_Number=CC0603KRX7R9BB103, Footprint=Capacitor_SMD:C_0603_1608Metric, Datasheet=CC0603KRX7R9BB103, Description="Unpolarized capacitor", ki_fp_filters=C_*
C7 C8: library part C_1206_3216Metric, "Capacitor SMD 1206 (3216 Metric), square (rectangular) end terminal, IPC_7351 nominal, (Body size source: IPC-SM-782 page 76, https://www.pcb-3d.com/wordpress/wp-content/uploads/ipc-sm-782a_amendment_1_and_2.pdf), generated with kicad-footprint-generator", MANUFACTURER=Kemet, LCSC=C2168111, Manufacturer_Part_Number=C1206C106K3RACTU, Footprint=Capacitor_SMD:C_1206_3216Metric, Datasheet=C1206C106K3RACTU, Description="Unpolarized capacitor", ki_fp_filters=C_*
C10: library part C_1210_3225Metric, "Capacitor SMD 1210 (3225 Metric), square (rectangular) end terminal, IPC_7351 nominal, (Body size source: IPC-SM-782 page 76, https://www.pcb-3d.com/wordpress/wp-content/uploads/ipc-sm-782a_amendment_1_and_2.pdf), generated with kicad-footprint-generator", MANUFACTURER=Murata, LCSC=C21397, Manufacturer_Part_Number=GRM32ER71E226KE15L, Footprint=Capacitor_SMD:C_1210_3225Metric, Datasheet=GRM32ER71E226KE15L, Description="Unpolarized capacitor", ki_fp_filters=C_*
C11 C13: library part C_0603_1608Metric, "Capacitor SMD 0603 (1608 Metric), square (rectangular) end terminal, IPC_7351 nominal, (Body size source: IPC-SM-782 page 76, https://www.pcb-3d.com/wordpress/wp-content/uploads/ipc-sm-782a_amendment_1_and_2.pdf), generated with kicad-footprint-generator", MANUFACTURER=Yageo, LCSC=C2191217, Manufacturer_Part_Number=AC0603JRNPO9BN300, Footprint=Capacitor_SMD:C_0603_1608Metric, Datasheet=AC0603JRNPO9BN300, Description="Unpolarized capacitor", ki_fp_filters=C_*
CR1: library part SOT23-6L_STM, LCSC=C2827654, Manufacturer_Part_Number=USBLC6-2SC6, Footprint=USBLC6_2SC6:SOT23-6L_STM, Datasheet=USBLC6-2SC6, ki_fp_filters="SOT23-6L_STM SOT23-6L_STM-M SOT23-6L_STM-L"
D1 D2 D3: library part LED_0805_2012Metric, "LED SMD 0805 (2012 Metric), square (rectangular) end terminal, IPC_7351 nominal, (Body size source: https://docs.google.com/spreadsheets/d/1BsfQQcO9C6DZCsRaXUlFlo91Tg2WpOkGARC1WS5S8t0/edit?usp=sharing), generated with kicad-footprint-generator", MANUFACTURER=Kingbright, LCSC=C5569446, Manufacturer_Part_Number=APT2012LZGCK, Footprint=LED_SMD:LED_0805_2012Metric, Datasheet=APT2012LZGCK, Description="Light emitting diode", ki_fp_filters="LED* LED_SMD:* LED_THT:*"
FID1 FID2 FID3: library part Fiducial_1mm_Mask2mm, "Circular Fiducial, 1mm bare copper, 2mm soldermask opening (Level A)", Footprint=Fiducial:Fiducial_1mm_Mask2mm, Description="Fiducial Marker", ki_fp_filters=Fiducial*
H1 H2 H3 H4: library part MountingHole_3.2mm_M3_ISO7380, "Mounting Hole 3.2mm, no annular, M3, ISO7380", Footprint=MountingHole:MountingHole_3.2mm_M3_ISO7380, Description="Mounting Hole without connection", ki_fp_filters=MountingHole*
IC1: library part QFP50P900X900X160-48N, "ST LQFP48", Manufacturer_Part_Number=STM32F103C6T7A, LCSC=C222074, MANUFACTURER=STMicroelectronics, Footprint=STM32F103C6T7A:QFP50P900X900X160-48N, Datasheet=http://www.st.com/st-web-ui/static/active/en/resource/technical/document/datasheet/CD00210843.pdf, Description="STM32F103C6T7A, 32 bit ARM Cortex M3 Microcontroller 72MHz 32 kB Flash, 10 kB RAM, USB CAN I2C 48-Pin LQFP"
J1: library part TYPE-C-31-M-12, "Korean Hroparts Elec, Power only USB connector supporting up to 3A", MANUFACTURER="Korean Hroparts Elec", LCSC=C5337088, Footprint=USB-C-Power-tester:TYPE-C-31-M-12, Datasheet=TYPE-C-31-M-12, Manufacturer_Part_Number=TYPE-C-31-M-12, ki_fp_filters=USB*C*Receptacle*
J2: library part PinHeader_2x03_P2.54mm_Vertical, "Through hole straight pin header, 2x03, 2.54mm pitch, double rows", MANUFACTURER=BOOMELE, LCSC=C65114, Manufacturer_Part_Number=2.54-2*3P, Footprint=Connector_PinHeader_2.54mm:PinHeader_2x03_P2.54mm_Vertical, Datasheet=2.54-2*3P, ki_fp_filters=Connector*:*_2x??_*
J3: library part CONN_1935190_PXC, MANUFACTURER="Phoenix Contact", LCSC=C6047339, Manufacturer_Part_Number=1935190, Footprint=1935190:CONN_1935190_PXC, Datasheet=1935190, ki_fp_filters=CONN_1935190_PXC
L1: library part IND_5028_TDK, MANUFACTURER=TDK, LCSC=C307836, Manufacturer_Part_Number=VLCF5020T-2R7N1R7, Footprint=VLCF5020T-2R7N1R7:IND_5028_TDK, Datasheet=VLCF5020T-2R7N1R7, Description="Inductor with ferrite core", ki_fp_filters="Choke_* *Coil* Inductor_* L_*"
R1: library part R_0603_1608Metric, "Resistor SMD 0603 (1608 Metric), square (rectangular) end terminal, IPC_7351 nominal, (Body size source: IPC-SM-782 page 72, https://www.pcb-3d.com/wordpress/wp-content/uploads/ipc-sm-782a_amendment_1_and_2.pdf), generated with kicad-footprint-generator", MANUFACTURER=EYANG, LCSC=C267576, Manufacturer_Part_Number=R0603RXX202XF10LTS, Footprint=Resistor_SMD:R_0603_1608Metric, Datasheet=R0603RXX202XF10LTS, Description=Resistor, ki_fp_filters=R_*
R2: library part R_0603_1608Metric, "Resistor SMD 0603 (1608 Metric), square (rectangular) end terminal, IPC_7351 nominal, (Body size source: IPC-SM-782 page 72, https://www.pcb-3d.com/wordpress/wp-content/uploads/ipc-sm-782a_amendment_1_and_2.pdf), generated with kicad-footprint-generator", MANUFACTURER=Panasonic, LCSC=C403233, Manufacturer_Part_Number=ERJ3EKF4532V, Footprint=Resistor_SMD:R_0603_1608Metric, Datasheet=ERJ3EKF4532V, Description=Resistor, ki_fp_filters=R_*
R3 R6 R11 R17 R18 R19 R21 R33: library part R_0603_1608Metric, "Resistor SMD 0603 (1608 Metric), square (rectangular) end terminal, IPC_7351 nominal, (Body size source: IPC-SM-782 page 72, https://www.pcb-3d.com/wordpress/wp-content/uploads/ipc-sm-782a_amendment_1_and_2.pdf), generated with kicad-footprint-generator", MANUFACTURER=Yageo, LCSC=C469659, Manufacturer_Part_Number=RT0603FRE0710KL, Footprint=Resistor_SMD:R_0603_1608Metric, Datasheet=RT0603FRE0710KL, Description=Resistor, ki_fp_filters=R_*
R4 R5: library part R_0603_1608Metric, "Resistor SMD 0603 (1608 Metric), square (rectangular) end terminal, IPC_7351 nominal, (Body size source: IPC-SM-782 page 72, https://www.pcb-3d.com/wordpress/wp-content/uploads/ipc-sm-782a_amendment_1_and_2.pdf), generated with kicad-footprint-generator", MANUFACTURER=Yageo, LCSC=C228025, Manufacturer_Part_Number=AC0603FR-076K65L, Footprint=Resistor_SMD:R_0603_1608Metric, Datasheet=AC0603FR-076K65L, Description=Resistor, ki_fp_filters=R_*
R7: library part R_0603_1608Metric, "Resistor SMD 0603 (1608 Metric), square (rectangular) end terminal, IPC_7351 nominal, (Body size source: IPC-SM-782 page 72, https://www.pcb-3d.com/wordpress/wp-content/uploads/ipc-sm-782a_amendment_1_and_2.pdf), generated with kicad-footprint-generator", MANUFACTURER=Yageo, LCSC=C728638, Manufacturer_Part_Number=RT0603FRE07100KL, Footprint=Resistor_SMD:R_0603_1608Metric, Datasheet=RT0603FRE07100KL, Description=Resistor, ki_fp_filters=R_*
R8 R9 R25 R26 R30 R31: library part R_0603_1608Metric, "Resistor SMD 0603 (1608 Metric), square (rectangular) end terminal, IPC_7351 nominal, (Body size source: IPC-SM-782 page 72, https://www.pcb-3d.com/wordpress/wp-content/uploads/ipc-sm-782a_amendment_1_and_2.pdf), generated with kicad-footprint-generator", MANUFACTURER=Yageo, LCSC=C95177, Manufacturer_Part_Number=RC0603JR-070RL, Footprint=Resistor_SMD:R_0603_1608Metric, Datasheet=RC0603JR-070RL, Description=Resistor, ki_fp_filters=R_*
R10: library part R_0603_1608Metric, "Resistor SMD 0603 (1608 Metric), square (rectangular) end terminal, IPC_7351 nominal, (Body size source: IPC-SM-782 page 72, https://www.pcb-3d.com/wordpress/wp-content/uploads/ipc-sm-782a_amendment_1_and_2.pdf), generated with kicad-footprint-generator", MANUFACTURER="ROHM Semicon", LCSC=C880952, Manufacturer_Part_Number=UCR03EVPFLR100, Footprint=Resistor_SMD:R_0603_1608Metric, Datasheet=UCR03EVPFLR100, Description=Resistor, ki_fp_filters=R_*
R12 R13: library part R_0603_1608Metric, "Resistor SMD 0603 (1608 Metric), square (rectangular) end terminal, IPC_7351 nominal, (Body size source: IPC-SM-782 page 72, https://www.pcb-3d.com/wordpress/wp-content/uploads/ipc-sm-782a_amendment_1_and_2.pdf), generated with kicad-footprint-generator", MANUFACTURER=Vishay, LCSC=C844933, Manufacturer_Part_Number=CRCW06035K10FKEA, Footprint=Resistor_SMD:R_0603_1608Metric, Datasheet=CRCW06035K10FKEA, ki_fp_filters=R_*
R14: library part R_0603_1608Metric, "Resistor SMD 0603 (1608 Metric), square (rectangular) end terminal, IPC_7351 nominal, (Body size source: IPC-SM-782 page 72, https://www.pcb-3d.com/wordpress/wp-content/uploads/ipc-sm-782a_amendment_1_and_2.pdf), generated with kicad-footprint-generator", MANUFACTURER=KAMAYA, LCSC=C340503, Manufacturer_Part_Number=RMC1/16K152FTP, Footprint=Resistor_SMD:R_0603_1608Metric, Datasheet=RMC1/16K152FTP, Description=Resistor, ki_fp_filters=R_*
R20 R22 R23 R24 R28 R29: library part R_0603_1608Metric, "Resistor SMD 0603 (1608 Metric), square (rectangular) end terminal, IPC_7351 nominal, (Body size source: IPC-SM-782 page 72, https://www.pcb-3d.com/wordpress/wp-content/uploads/ipc-sm-782a_amendment_1_and_2.pdf), generated with kicad-footprint-generator", MANUFACTURER=Vishay, LCSC=C511383, Manufacturer_Part_Number=CRCW060347R0FKEA, Footprint=Resistor_SMD:R_0603_1608Metric, Datasheet=CRCW060347R0FKEA, Description=Resistor, ki_fp_filters=R_*
R27: library part R_0603_1608Metric, "Resistor SMD 0603 (1608 Metric), square (rectangular) end terminal, IPC_7351 nominal, (Body size source: IPC-SM-782 page 72, https://www.pcb-3d.com/wordpress/wp-content/uploads/ipc-sm-782a_amendment_1_and_2.pdf), generated with kicad-footprint-generator", MANUFACTURER=Panasonic, Manufacturer_Part_Number=ERJ-3EKF9091V, Footprint=Resistor_SMD:R_0603_1608Metric, Datasheet=ERJ-3EKF9091V, Description=Resistor, ki_fp_filters=R_*
S1 S2: library part SWITCH_43SMTR92LFS, MANUFACTURER=C&K, LCSC=C221880, Manufacturer_Part_Number=PTS645SM43SMTR92, Footprint=PTS645SM43SMTR92_LFS:SWITCH_43SMTR92LFS, Datasheet=https://www.ckswitches.com/media/1471/pts645.pdf, Description="SWITCH TACTILE SPST-NO 0.05A 12V"
TP1 TP2 TP3: library part TestPoint_Pad_D2.0mm, "SMD pad as test Point, diameter 2.0mm", Footprint=TestPoint:TestPoint_Pad_D2.0mm, Description="test point", ki_fp_filters="Pin* Test*"
U1: library part DSS0012A, LCSC=C2862062, Manufacturer_Part_Number=TPS61096ADSSR, Footprint=TPS61096ADSSR:DSS0012A, Datasheet=TPS61096ADSSR, ki_fp_filters=DSS0012A
U2: library part SOT-23-5, "SOT, 5 Pin (https://www.jedec.org/sites/default/files/docs/Mo-178c.PDF variant AA), generated with kicad-footprint-generator ipc_gullwing_generator.py", LCSC=C46243, Manufacturer_Part_Number=LD3985M33R, Footprint=Package_TO_SOT_SMD:SOT-23-5, Datasheet=http://www.st.com/internet/com/TECHNICAL_RESOURCES/TECHNICAL_LITERATURE/DATASHEET/CD00003395.pdf, Description="150mA Low Dropout Voltage Regulator, Fixed Output 3.3V, SOT-23-5", ki_fp_filters=SOT?23*
U3: library part RGW0020A-IPC_A, LCSC=C114839, Manufacturer_Part_Number=TPS7A4700RGWR, Footprint=TPS7A4700RGWR:RGW0020A-IPC_A, Datasheet=TPS7A4700RGWR, ki_fp_filters="RGW0020A-IPC_A RGW0020A-IPC_B RGW0020A-IPC_C RGW0020A-MFG"
U4: library part SOP65P640X120-16N, LCSC=C48263, Manufacturer_Part_Number=ADS1220xPW, Footprint=ADS1220IPWR:SOP65P640X120-16N, Datasheet=http://www.ti.com/lit/ds/symlink/ads1220.pdf, Description="Low-power, quad-input, 24-bit analog to digital converter, integrated temperature sensor, SPI interface, TSSOP-16 package", ki_fp_filters=*TSSOP*4.4x5mm*P0.65mm*
U5 U6: library part RSE0008A, Manufacturer_Part_Number=TS5A21366RSER, Footprint=TS5A21366RSER:RSE0008A, Datasheet=TS5A21366RSER, ki_fp_filters=RSE0008A
U7 U8: library part X15, MANUFACTURER="Johanson Dielectrics Inc.", LCSC=C111274, Manufacturer_Part_Number=250X15W104MV4E, Footprint=250X15W104MV4E:X15, Datasheet=250X15W104MV4E, ki_fp_filters="X15 X15-M X15-L"
Y1: library part Crystal_SMD_5032-4Pin_5.0x3.2mm, "SMD Crystal SERIES SMD2520/4 http://www.icbase.com/File/PDF/HKC/HKC00061008.pdf, 5.0x3.2mm^2 package", MANUFACTURER="YXC Crystal Oscillators", LCSC=C20617600, Manufacturer_Part_Number=XL1SI-111-8M, Footprint=Crystal:Crystal_SMD_5032-4Pin_5.0x3.2mm, Datasheet=XL1SI-111-8M, Description="Four pin crystal, GND on pins 2 and 4", ki_fp_filters=Crystal*

## Via types
v1: diameter 0.7, hole 0.3, F.Cu to B.Cu, tented both sides, 149 vias
v2: diameter 0.6, hole 0.3, F.Cu to B.Cu, tented both sides, 23 vias

## Nets (pads, with @x,y where several pads share a name; then routed paths per layer and width w, separated by ;. In a path a pad name is that pad's centre, name@x,y a point inside that pad or via, vN(x,y) a via of type N, cw(c..) or ccw(c..) an arc to the next point about the centre after c; other vN are vias at no path point)
+3V3: C5.1 C6.1 C12.1 C14.1 C16.1 C17.1 C18.2 C24.1 C25.1 IC1.1 IC1.9 IC1.24 IC1.36 IC1.48 J2.2 R4.1 R14.2 S2.1 TP3.1 U2.5 U4.13 | length 117.1
  F.Cu w0.25: IC1.24 126.875,23.375 C16.1 128.835,23.375 v2(128.84,23.38) v2@128.845,23.375
  F.Cu w0.3: v2@112.95,20.464 117.375,24.889 C17.1 ; v2(112.99,20.49) 112.99,16.67 113.91,15.75 C12.1 ; IC1.9 122.6,14.112 122.813,13.9 123.74,13.9 124.165,13.475 C14.1
  F.Cu w0.35: v2@105.9,24.317 R14.2@105.9,25.582 ; U2.5 107.583,7.76 107.71,7.76 107.725,7.775 C5.1 C6.1 111.45,7.775 R4.1 ; TP3.1@111.5,3 TP3.1 111.7,6.31 111.5,6.51 111.5,6.71 R4.1 ; C12.1 112.875,13.612 112.875,7.725 ; C14.1 124.165,8.495 123.33,7.66 121.68,7.66 119.908,5.888 S2.1 112.875,7.725 ; J2.2 127.672,29.272 C18.2 129.927,31.527 134.843,31.527 135.55,30.82 C25.1 C24.1 135.55,28.14 135.975,27.715 U4.13 ; R4.1 112.875,7.725
  B.Cu w0.242: v2(105.865,24.282) 107.918,22.23 111.25,22.23 v2(112.99,20.49)
  B.Cu w0.3: v2(112.99,20.49) 112.99,27.2 113.26,27.47
  B.Cu w0.35: 113.26,27.47 119.06,33.27 123.02,33.27 123.64,32.65 123.64,30.512 J2.2 128.84,25.312 v2(128.84,23.38)
+5V: C1.1 C2.1 C3.1 CR1.5 J1.A4 J1.A9 J1.B4 J1.B9 L1.1 R1.1 U1.3 U1.6 U2.1 U2.3 | length 78.8
  F.Cu w0.25: J1.A4 102.475,19.875 102.72,20.12 102.72,21.97 ; L1.1 104.495,35.875 106.985,35.875 107.11,36 U1.3 ; C1.1 99.26,35.45 99.13,35.32 99.13,35.31 97.98,34.16 97.98,27.77 99.04,26.71 100.76,26.71 100.77,26.72 105.44,26.72 ; U1.6 107.35,33.88 106.36,32.89 R1.1 105.95,31.49 105.44,30.98 105.44,26.72 ; CR1.5 109.05,23.061 108.599,22.61 103.44,22.61 102.8,21.97 102.72,21.97 ; 102.72,21.97 102.72,24 105.44,26.72
  F.Cu w0.35: J1.B4 100.55,15 99.79,15.76 99.79,18.68 100.71,19.6 J1.B9 ; J1.A9@101.55,14.775 103.06,14.775 103.455,14.38 103.455,13.82 100.2,10.565 100.2,7.6 C2.1 C3.1 ; U2.3 101.95,4.88 101.92,4.91 101.92,5.92 102.5,6.5 C3.1 ; U2.1 104.308,6.8 C3.1
+5V5: C7.1 C8.1 R6.1 R7.1 TP1.1 U1.9 U3.15 U3.16 | length 22.2
  F.Cu w0.25: R6.1 110,37.21 110.77,36.44 110.77,35.86 110.41,35.5 ; 113.74,40.3 113.76,40.32 ; C8.1 115.235,33.6 113.14,33.6 C7.1 110.96,34.88 110.34,35.5 U1.9 110.26,35.5 ; U3.16 U3.16@118.83,35.354 ; 110.26,35.5 110.41,35.5 ; 110.26,35.5 110.41,35.5
  F.Cu w0.3: R6.1 112.4,38.3 112.89,38.79 112.89,39.36 113.725,40.195 113.885,40.195 ; TP1.1 113.76,40.32 113.885,40.195 ; R7.1 114.055,40.025 113.885,40.195
+5V_LN: C20.1 C21.1 C22.1 C23.1 R5.1 R10.1 TP2.1 U3.1 U3.3 U3.20 U4.12 U5.2 U5.4 U5.8 U6.2 | length 59.8
  F.Cu w0.25: U3.3 123.325,37.735 123.71,37.35 123.71,36.791 123.354,36.435 U3.1 123.095,36.435 124.48,35.05 R10.1 125.73,35.05 125.78,35.1 R5.1 ; C23.1 132.13,35.1 R5.1 ; v2(146.2,30.74) 146.2,30.35 C21.1 ; U5.2 149.06,32.667 148.86,32.467 U5.4 ; U5.8 U5.4 ; R5.1 144.88,35.1 v2(145.84,34.14) 145.84,33.687 C20.1 U5.4
  F.Cu w0.3: U3.20 122.109,35.359 122.501,35.751 U3.1
  F.Cu w0.35: TP2.1 R5.1 ; U4.12 136.625,27.125 137.05,27.55 C22.1 C23.1 ; C21.1 U6.2
  B.Cu w0.25: v2(145.84,34.14) 145.84,33.88 145.5,33.54 145.5,31.14 145.9,30.74 v2(146.2,30.74)
AC_EXC0: J3.1 R30.1 U5.1 U6.1 | length 30.1
  F.Cu w0.25: v2(147.5,30.72) 147.655,30.72 U6.1 ; v2(149.33,34.34) 149.56,34.11 U5.1 149.56,33.69
  F.Cu w0.35: 149.56,33.69 150,34.13 150.25,34.13 153.043,31.337 J3.1 157.975,29.135 154.08,25.24 R30.1
  B.Cu w0.25: v2(147.5,30.72) 146.8,31.42 146.8,34.44 147.32,34.96 147.48,34.96 147.49,34.97 148.7,34.97 v2(149.33,34.34)
AC_EXC1: J3.2 R31.1 U5.5 U6.5 | length 29.3
  F.Cu w0.25: U5.5 148.233,31.49 145.19,31.49 143.55,29.85 143.55,28.37 145.02,26.9 150.065,26.9 150.92,27.755 ; U6.5 150.92,27.755 ; R31.1 150.92,24.255 150.92,27.755
  F.Cu w0.35: R31.1 155.218,23.58 J3.2
AIN0: R28.1 U4.10 U8.2 | length 9.5
  F.Cu w0.35: U4.10 137.925,24.375 v1(137.93,24.37) ; v1(139.69,21.65) 141.091,21.65 U8.2 144.024,21.513 R28.1
  B.Cu w0.35: v1(137.93,24.37) 139.69,22.61 v1(139.69,21.65)
AIN1: R29.1 U4.7 U8.1 | length 7.2
  F.Cu w0.35: U4.7 137.925,19.445 138.25,19.12 139.52,19.12 139.86,19.46 139.89,19.43 U8.1 144.05,19.43 R29.1
BOOT1: IC1.20 J2.1 R11.1 | length 17.5
  F.Cu w0.25: J2.1 123.59,30.522 123.59,28.681 127.171,25.1 R11.1 126.77,25.1 126.46,24.79 126.46,24.51 123.89,21.94 123.89,20.798 124.601,20.088 IC1.20
DRDY: IC1.14 R20.1 | length 4.1
  F.Cu w0.25: IC1.14 126.526,17.088 126.84,16.773 126.84,15.975 R20.1
EXC0: IC1.21 U5.3 U6.7 | length 40.2
  F.Cu w0.242: v2(147.635,34.04) 148.175,34.04 148.56,33.655 U5.3 ; U6.7 150.225,29.98 ; 150.226,29.979 150.705,30.458 v2(150.705,30.99)
  F.Cu w0.3: IC1.21 126.575,20.588 126.984,20.18 127.519,20.18 127.559,20.22 128.945,20.22 v2(128.96,20.205)
  B.Cu w0.242: v2(147.635,34.04) 147.7,33.975 147.7,32.5 147.77,32.43 149.265,32.43 v2(150.705,30.99)
  B.Cu w0.35: v2(128.96,20.205) 130.435,20.205 136.96,26.73 148.81,26.73 151.28,29.2 151.28,30.415 v2(150.705,30.99)
EXC1: IC1.22 U5.7 U6.3 | length 32.1
  F.Cu w0.242: v2(147.575,27.85) 148.055,27.85 148.395,28.19 U6.3 ; U5.7 149.56,31.373 149.895,31.038 v2(149.895,30.99)
  F.Cu w0.3: IC1.22 126.732,21.088 127.04,20.78 v2(127.27,20.78)
  B.Cu w0.242: v2(147.575,27.85) 147.92,27.85 149.88,29.81 149.88,30.975 v2(149.895,30.99)
  B.Cu w0.35: v2(127.27,20.78) 127.32,20.83 128.026,20.83 128.071,20.875 129.365,20.875 136.34,27.85 v2(147.575,27.85)
GND: C1.2 C2.2 C3.2 C4.2 C5.2 C6.2 C7.2 C8.2 C9.2 C10.2 C11.1 C12.2 C13.1 C14.2 C15.1 C16.2 C17.2 C18.1 C20.2 C21.2 C22.2 C23.2 C24.2 C25.2 CR1.2 D1.1 D2.1 D3.1 IC1.8 IC1.23 IC1.35 IC1.47 J1.A1 J1.A12 J1.B1 J1.B12 J1.S1 J2.4 J3.5 R3.1 R8.2 R9.2 R11.2 R12.1 R13.1 R17.1 R18.2 R19.2 R21.1 R33.1 S1.1 U1.1 U1.2 U1.10 U1.13 U2.2 U3.7 U3.21 U4.4 U4.5 U5.6 U6.4 U6.6 U6.8 U7.3 U7.4 U8.3 U8.4 Y1.2 Y1.4 | length 73.5
  F.Cu w0.155: U6.4@149.025,28.81 U6.4 ; v1(149.045,31.01) 149.06,31.025 U5.6
  F.Cu w0.2: v1(106.65,36.5) U1.2 ; v1(106.65,37.35) 107,37 U1.1 ; U1.10 109.86,36 v1(110,36.14)
  F.Cu w0.242: U6.6 v1(150.605,29.48)
  F.Cu w0.3: C12.2 115.225,17.088 IC1.47 ; C17.2 119.1,25.265 IC1.35 ; U3.7 120.775,38.925 v1(121,38.7) ; IC1.8 122.1,13.625 C14.2@122.625,13.1 ; IC1.23 127.401,21.588 C16.2 ; v1(135.37,21.88) 135.975,21.275 U4.4 ; U4.5 136.625,21.705 v1(136.69,21.77) 136.69,24 v1(136.83,24.14) ; v1(149.025,27.96) 149.045,27.98 U6.4 ; U6.8 v1(149.045,31.01)
  F.Cu w0.4: J1.B12@102.02,20.445 v1@102.02,21.52
  F.Cu w0.483: J1.B1@101.781,14.1 v1@102.819,14.1
  F.Cu w0.6: C2.2@101,8.305 v1(101,9.295) ; C3.2@102.5,8.305 v1(102.5,9.295) ; v1(103.205,5.8) U2.2@104.195,5.8 ; C1.2@103.805,37.35 v1(104.795,37.35) ; R12.1@105.205,20.85 v1(106.195,20.85) ; R13.1 105.465,15.94 v1(106.35,15.94) ; v1(107.455,32.9) R3.1@108.445,32.9 ; C5.2@108.5,9.305 v1(108.5,10.295) ; C4.2@108.505,6.3 v1(109.495,6.3) ; v1(109.05,20.055) CR1.2@109.05,21.045 ; v1(109.3,10.605) D1.1@109.3,11.595 ; C6.2@110,9.305 v1(110,10.295) ; D3.1@110.255,43.7 v1(111.245,43.7) ; v1(113.255,30.3) R18.2@114.245,30.3 ; v1(113.305,28.7) R17.1@114.295,28.7 ; v1(114.005,17.3) C12.2@114.995,17.3 ; v1(114.105,20.7) R19.2@115.095,20.7 ; C9.2@114.2,36.91 v1(114.2,37.9) ; v1(114.4,11.205) C13.1@114.4,12.195 ; Y1.4 117.738,9.625 v1(118.738,10.625) 119.738,11.625 Y1.2 ; C17.2@118.925,25.43 v1(119.915,25.43) ; R8.2 v1(119.95,43.55) ; R9.2 v1(122.5,43.55) ; v1(122.63,11.785) C14.2@122.63,12.775 ; v1(123.2,9.1) C11.1@123.2,10.09 ; C15.1@127.7,11.51 v1(128.69,11.51) ; C16.2@127.705,21.83 v1(128.695,21.83) ; R11.2@129.16,25.1 v1(130.15,25.1) ; C18.1@129.205,29.3 v1(130.195,29.3) ; v1(132.955,28.7) C24.2@133.945,28.7 ; v1(132.955,30.15) C25.2@133.945,30.15 ; v1(134.1,14.405) R21.1@134.1,15.395 ; v1(135.8,14.405) R33.1@135.8,15.395 ; C22.2@138.605,28.65 v1(139.595,28.65) ; C23.2@138.605,30.15 v1(139.595,30.15) ; U8.3 v1(141.228,20.471) ; U7.3 v1(141.27,24.461) ; U8.4@142.083,20.458 v1(143.073,20.458) ; U7.4@142.155,24.45 v1(143.145,24.45) ; v1(144.54,32.43) C20.2@145.53,32.43 ; v1(144.55,29.543) C21.2@145.54,29.543
  F.Cu w1.1: v1@112.401,32.31 C8.2@113.439,32.31 ; C7.2 v1@115.849,34.88 ; v1(122.37,27.17) 122.37,28.208 ; C10.2@125.57,41.257 v1(125.57,42.295) ; D2.1 v1(128.6,41.238) ; v1(130.6,8.081) S1.1@130.6,9.119
  other v1: 101.6,1.78 104.14,1.78 106.68,1.78 109.22,1.78 120.65,1.78 134.62,1.78 137.16,1.78 142.24,1.78 147.32,1.78 152.4,1.78 154.94,1.78 116.84,4.32 120.65,4.32 130.81,4.32 127,6.86 134.62,6.86 137.16,6.86 142.24,6.86 147.32,6.86 152.4,6.86 157.48,6.86 96.52,9.4 154.94,9.4 105.41,10.67 161.29,10.67 134.62,11.94 137.16,11.94 142.24,11.94 147.32,11.94 152.4,11.94 154.94,13.21 102.78,14.1 107.95,14.48 139.7,14.48 144.78,14.48 149.86,14.48 161.29,15.75 110.49,17.02 154.94,17.02 131.6,17.34 119.08,17.59 121.31,17.59 123.41,17.59 119.08,19.31 121.31,19.31 123.41,19.31 161.29,20.83 119.08,20.98 121.31,20.98 123.06,20.98 102,21.73 116.42,22.91 96.52,24.64 101.6,24.64 114.3,24.64 161.29,25.91 96.52,27.18 104.17,27.56 154.94,28.45 161.29,30.99 96.52,32.26 112.295,32.35 131.2,33.33 135.89,33.53 138.43,33.53 142.24,33.53 154.927,33.519 102.13,34.78 115.96,34.88 146.39,35.25 149.86,35.27 119.15,36.79 120.97,36.79 96.52,37.34 132.08,37.34 137.16,37.34 142.24,37.34 147.32,37.34 152.4,37.34 157.48,37.34 119.18,37.735 120.125,37.735 121,37.735 119.18,38.7 101.6,39.88 106.68,39.88 101.6,42.42 106.68,42.42 132.08,42.42 137.16,42.42 142.24,42.42 147.32,42.42
HSE_IN: C13.2 IC1.5 Y1.3 | length 6.7
  F.Cu w0.35: C13.2 115.938,12.275 Y1.3 117.738,12.828 118.67,13.76 120.13,13.76 120.6,14.23 IC1.5
HSE_OUT: C11.2 IC1.6 Y1.1 | length 7.5
  F.Cu w0.35: Y1.1 120.4,8.975 C11.2 121.625,12.035 121.1,12.56 IC1.6
Net-(C10-Pad1): C10.1 R10.2 | length 1.7
  F.Cu w0.25: C10.1 125.6,38.295 R10.2
Net-(D1-A): D1.2 R4.2 | length 2.5
  F.Cu w0.35: D1.2 111.5,11.638 R4.2
Net-(D2-A): D2.2 R5.2 | length 1.6
  F.Cu w0.25: R5.2 D2.2
Net-(D3-A): D3.2 R6.2 | length 1.9
  F.Cu w0.25: R6.2 D3.2
Net-(J1-CC1): J1.A5 R12.2 | length 4
  F.Cu w0.35: J1.A5 102.84,18.55 103.6,19.31 R12.2
Net-(J1-CC2): J1.B5 R13.2 | length 2.5
  F.Cu w0.35: J1.B5 102.34,15.55 102.75,15.96 R13.2
Net-(J3-Pad3): J3.3 R28.2 | length 12.3
  F.Cu w0.35: R28.2 157.854,21.458 J3.3
Net-(J3-Pad4): J3.4 R29.2 | length 13.5
  F.Cu w0.35: R29.2 154.854,19.458 J3.4
Net-(R25-Pad1): R25.1 R27.1 R30.2 | length 4.5
  F.Cu w0.35: R25.1 147.705,25.42 R27.1 149.93,25.255 R30.2 ; R30.2@149.78,25.255 R30.2@149.945,25.42
Net-(R26-Pad1): R26.1 R27.2 R31.2 | length 4.5
  F.Cu w0.35: R26.1 147.685,23.42 R27.2 149.92,23.605 R31.2 ; R31.2@149.76,23.605 R31.2@149.945,23.42
Net-(U1-FB): R2.2 R3.2 U1.7 | length 5.2
  F.Cu w0.25: R3.2 109.43,32.28 ; U1.7 109.43,34.32 109.43,32.28 ; R2.2 110.475,31.235 109.43,32.28
Net-(U1-ILIM): R1.2 U1.5 | length 1.6
  F.Cu w0.25: R1.2 106.41,35 U1.5
Net-(U1-SW): L1.2 U1.4 | length 10
  F.Cu w0.25: L1.2 103.43,29.76 104.505,30.835 104.505,34.295 105.685,35.475 107.325,35.475 U1.4
Net-(U1-VOSNS): R2.1 U1.8 | length 2.9
  F.Cu w0.25: U1.8 109.75,35 110.49,34.26 R2.1
Net-(U2-BYP): C4.1 U2.4 | length 2
  F.Cu w0.35: U2.4 108.345,4.88 C4.1
Net-(U3-0P4V): R8.1 U3.10 | length 1.8
  F.Cu w0.25: U3.10 118.825,41.765 R8.1
Net-(U3-3P2V): R9.1 U3.6 | length 1.8
  F.Cu w0.25: U3.6 121.425,41.865 R9.1
Net-(U3-EN): R7.2 U3.13 | length 2.3
  F.Cu w0.25: R7.2 116.195,38.375 116.835,37.735 U3.13
Net-(U3-NR): C9.1 U3.14 | length 2.1
  F.Cu w0.25: C9.1 116.435,36.875 116.645,37.085 U3.14
Net-(U4-CLK): R33.2 U4.3 | length 3.3
  F.Cu w0.35: U4.3 135.325,18.265 135.33,18.26 135.33,18.04 135.75,17.62 R33.2
Net-(U4-DIN): R23.2 U4.16 | length 8.6
  F.Cu w0.3: R23.2 129.865,20.245 134.025,24.405 U4.16
Net-(U4-DOUT{slash}{\D\R\D\Y\}\)\: R22.2 U4.15 | length 10.9
  F.Cu w0.3: R22.2 130.8,17.6 131.07,17.87 131.07,20.77 134.675,24.375 U4.15
Net-(U4-SCLK): R24.2 U4.1 | length 6.8
  F.Cu w0.3: R24.2 131.19,16.12 v2(131.2,16.13) ; v2(134.02,18.63) 134.02,20.225 U4.1
  B.Cu w0.3: v2(131.2,16.13) 131.52,16.13 v2(134.02,18.63)
Net-(U4-{\C\S\}\)\: R21.2 U4.2 | length 3.4
  F.Cu w0.35: R21.2 134.075,17.575 134.675,18.175 U4.2
Net-(U4-{\D\R\D\Y\}\)\: R20.2 U4.14 | length 14.1
  F.Cu w0.3: R20.2 130.58,14.6 132.52,16.54 132.52,21.484 135.325,24.289 U4.14
REF0+: R25.2 U4.11 U7.2 | length 9.5
  F.Cu w0.35: U4.11 137.275,26.755 137.95,27.43 139.45,27.43 139.45,26.09 140.037,25.503 U7.2 144.037,25.503 R25.2
REF0-: R26.2 U4.6 U7.1 | length 8.6
  F.Cu w0.35: U4.6 137.275,21.015 139.68,23.42 U7.1 R26.2
SPI1_MISO: IC1.16 R22.1 | length 2.8
  F.Cu w0.25: IC1.16 127.739,18.088 R22.1
SPI1_MOSI: IC1.17 R23.1 | length 2.8
  F.Cu w0.25: IC1.17 127.188,18.588 127.725,19.125 R23.1
SPI1_SCK: IC1.15 R24.1 | length 3.4
  F.Cu w0.25: IC1.15 126.591,17.588 127.46,16.719 127.46,16.39 127.73,16.12 R24.1
STM_BOOT0: IC1.44 R19.1 S2.3 | length 24.9
  F.Cu w0.3: S2.3 114.724,1.4 v2(116.18,1.4) ; R19.1 115.487,18.588 IC1.44
  F.Cu w0.35: v2(113.9,19.05) 114.999,19.05 R19.1
  B.Cu w0.3: v2(113.9,19.05) 113.47,19.05 112.55,18.13 112.55,5.03 v2(116.18,1.4)
STM_RST: C15.2 IC1.7 J2.3 S1.3 | length 27.6
  F.Cu w0.3: v2(121.59,16.64) 121.6,16.63 IC1.7
  F.Cu w0.35: S1.3 126.1,11.413 C15.2 126.137,12.603 v2(126.13,12.61)
  B.Cu w0.3: J2.3 121.07,30.542 121.07,22.17 120.51,21.61 120.51,17.36 121.23,16.64 v2(121.59,16.64) 122.1,16.64 v2(126.13,12.61)
SWCLK: IC1.37 J2.6 R17.2 | length 12.8
  F.Cu w0.35: v2(115.65,22.07) 115.668,22.088 IC1.37 ; R17.2 v2(117.25,28.7) 119.228,28.7 J2.6
  B.Cu w0.35: v2(115.65,22.07) 115.65,27.1 v2(117.25,28.7)
SWDIO: IC1.34 J2.5 R18.1 | length 15.3
  F.Cu w0.35: R18.1 117.35,30.3 v2(117.36,30.29) 118.278,30.29 J2.5 ; v2(119.6,21.98) IC1.34
  B.Cu w0.35: v2(117.36,30.29) 118.3,29.35 118.3,23.28 v2(119.6,21.98)
unconnected-(IC1-PA0-WKUP-Pad10): IC1.10
unconnected-(IC1-PA1-Pad11): IC1.11
unconnected-(IC1-PA2-Pad12): IC1.12
unconnected-(IC1-PA3-Pad13): IC1.13
unconnected-(IC1-PA8-Pad29): IC1.29
unconnected-(IC1-PA9-Pad30): IC1.30
unconnected-(IC1-PA10-Pad31): IC1.31
unconnected-(IC1-PA15-Pad38): IC1.38
unconnected-(IC1-PB0-Pad18): IC1.18
unconnected-(IC1-PB1-Pad19): IC1.19
unconnected-(IC1-PB3-Pad39): IC1.39
unconnected-(IC1-PB4-Pad40): IC1.40
unconnected-(IC1-PB5-Pad41): IC1.41
unconnected-(IC1-PB6-Pad42): IC1.42
unconnected-(IC1-PB7-Pad43): IC1.43
unconnected-(IC1-PB8-Pad45): IC1.45
unconnected-(IC1-PB9-Pad46): IC1.46
unconnected-(IC1-PB12-Pad25): IC1.25
unconnected-(IC1-PB13-Pad26): IC1.26
unconnected-(IC1-PB14-Pad27): IC1.27
unconnected-(IC1-PB15-Pad28): IC1.28
unconnected-(IC1-PC13-TAMPER-RTC-Pad2): IC1.2
unconnected-(IC1-PC14-_OSC32_IN-Pad3): IC1.3
unconnected-(IC1-PC15-_OSC32_OUT-Pad4): IC1.4
unconnected-(J1-SBU1-PadA8): J1.A8
unconnected-(J1-SBU2-PadB8): J1.B8
unconnected-(S1-Pad2): S1.2
unconnected-(S1-Pad4): S1.4
unconnected-(S2-Pad2): S2.2
unconnected-(S2-Pad4): S2.4
unconnected-(U1-HVO1-Pad12): U1.12
unconnected-(U1-HVO2-Pad11): U1.11
unconnected-(U3-0P1V-Pad12): U3.12
unconnected-(U3-0P2V-Pad11): U3.11
unconnected-(U3-0P8V-Pad9): U3.9
unconnected-(U3-1P6V-Pad8): U3.8
unconnected-(U3-6P4V1-Pad5): U3.5
unconnected-(U3-6P4V2-Pad4): U3.4
unconnected-(U3-NC-Pad2): U3.2
unconnected-(U3-NC-Pad17): U3.17
unconnected-(U3-NC-Pad18): U3.18
unconnected-(U3-NC-Pad19): U3.19
unconnected-(U4-REFN0-Pad8): U4.8
unconnected-(U4-REFP0-Pad9): U4.9
USB_D+: CR1.3 J1.A6 J1.B6 | length 14.1
  F.Cu w0.242: J1.A6 101.553,17.603 108.595,17.603 109.308,18.316 109.308,19.432 109.673,19.797 109.673,20.01 110,20.336 CR1.3
  F.Cu w0.3: J1.B6 102.45,16.55 102.525,16.625 102.525,17.475 102.45,17.55 J1.A6
USB_D-: CR1.1 J1.A7 J1.B7 | length 13.4
  F.Cu w0.242: J1.B7 108.488,18.05 108.792,18.354 108.792,19.432 108.427,19.797 108.427,20.01 108.1,20.336 CR1.1
  F.Cu w0.3: J1.A7 100.55,17.05 100.475,17.125 100.475,17.975 100.55,18.05 J1.B7
USB_Dn: CR1.6 IC1.32 R14.1 | length 19.9
  F.Cu w0.2: IC1.32@120.575,24.188 IC1.32@120.6,24.164
  F.Cu w0.242: R14.1 107.565,24.335 CR1.6 108.497,24.197 108.497,24.562 108.862,24.562 111.307,27.007 120.422,27.007 121.227,26.202 121.227,25.002 120.6,24.375 120.6,24.164 IC1.32
USB_Dp: CR1.4 IC1.33 | length 15.8
  F.Cu w0.2: IC1.33@120.1,24.164 IC1.33@120.125,24.188
  F.Cu w0.242: CR1.4 110,25.142 111.471,26.613 120.258,26.613 120.833,26.038 120.833,25.166 120.1,24.433 120.1,24.164 IC1.33
pads on no net: FID1.Un1 FID2.Un1 FID3.Un1 H1.Un1 H2.Un1 H3.Un1 H4.Un1 J1.Un1 J1.Un2 U1.V

## Polygon pours and split planes (outlines as drawn)
GND on F.Cu "F.Cu-GND-9" (solid, remove dead copper, pour order 30052): 93.57,45.06 162.54,45.07 162.55,0.08 93.55,0.08 93.55,45.08
GND on F.Cu "F.Cu-GND-8" (solid, remove dead copper, pour order 30063): 136.54,23.471 136.84,23.471 137.153,24.006 136.83,24.141 136.48,24.14
+3V3 on F.Cu "F.Cu-+3V3-1" (solid, remove dead copper, pour order 30053): 114.6,16.15 114.61,15.3 116.25,15.31 117.72,14.31 118.74,14.33 118.76,15.82 118.28,15.83 117.98,15.85 117.82,16.11 117.82,16.73 116.25,16.75 115.74,16.18 114.59,16.2 114.6,16.19 114.6,16.18 114.6,16.17
GND on F.Cu "F.Cu-GND-7" (solid, remove dead copper, pour order 30059): 142.445,24.75 142.445,24.15 143.145,24.1 143.146,24.45 143.145,24.8
+5V5 on F.Cu "F.Cu-+5V5" (solid, remove dead copper, pour order 30056): 117.1,36.56 116.91,34.3 115.89,33.44 115.88,31.57 117.24,31.56 117.25,32.91 119.02,34.5 119.02,36.03 118.33,36.02 118.33,36.6 117.13,36.58
GND on F.Cu "F.Cu-GND-6" (solid, remove dead copper, pour order 30055): 118.43,22.18 124.24,22.19 124.21,16.49 118.42,16.52 118.42,22.19 118.46,22.18
GND on F.Cu "F.Cu-GND-5" (solid, remove dead copper, pour order 30064): 136.84,22.47 136.54,22.47 136.367,21.904 136.69,21.769 137.013,21.904
GND on F.Cu "F.Cu-GND-4" (solid, remove dead copper, pour order 30058): 142.373,20.758 142.373,20.158 143.073,20.108 143.074,20.458 143.073,20.808
GND on F.Cu "F.Cu-GND-3" (solid, remove dead copper, pour order 30060): 118.031,10.342 118.455,9.918 118.985,10.378 118.739,10.626 118.491,10.872